# EAGLE board Papilio-VGA_Wing-Panel-v10 (EAGLE 6.3)
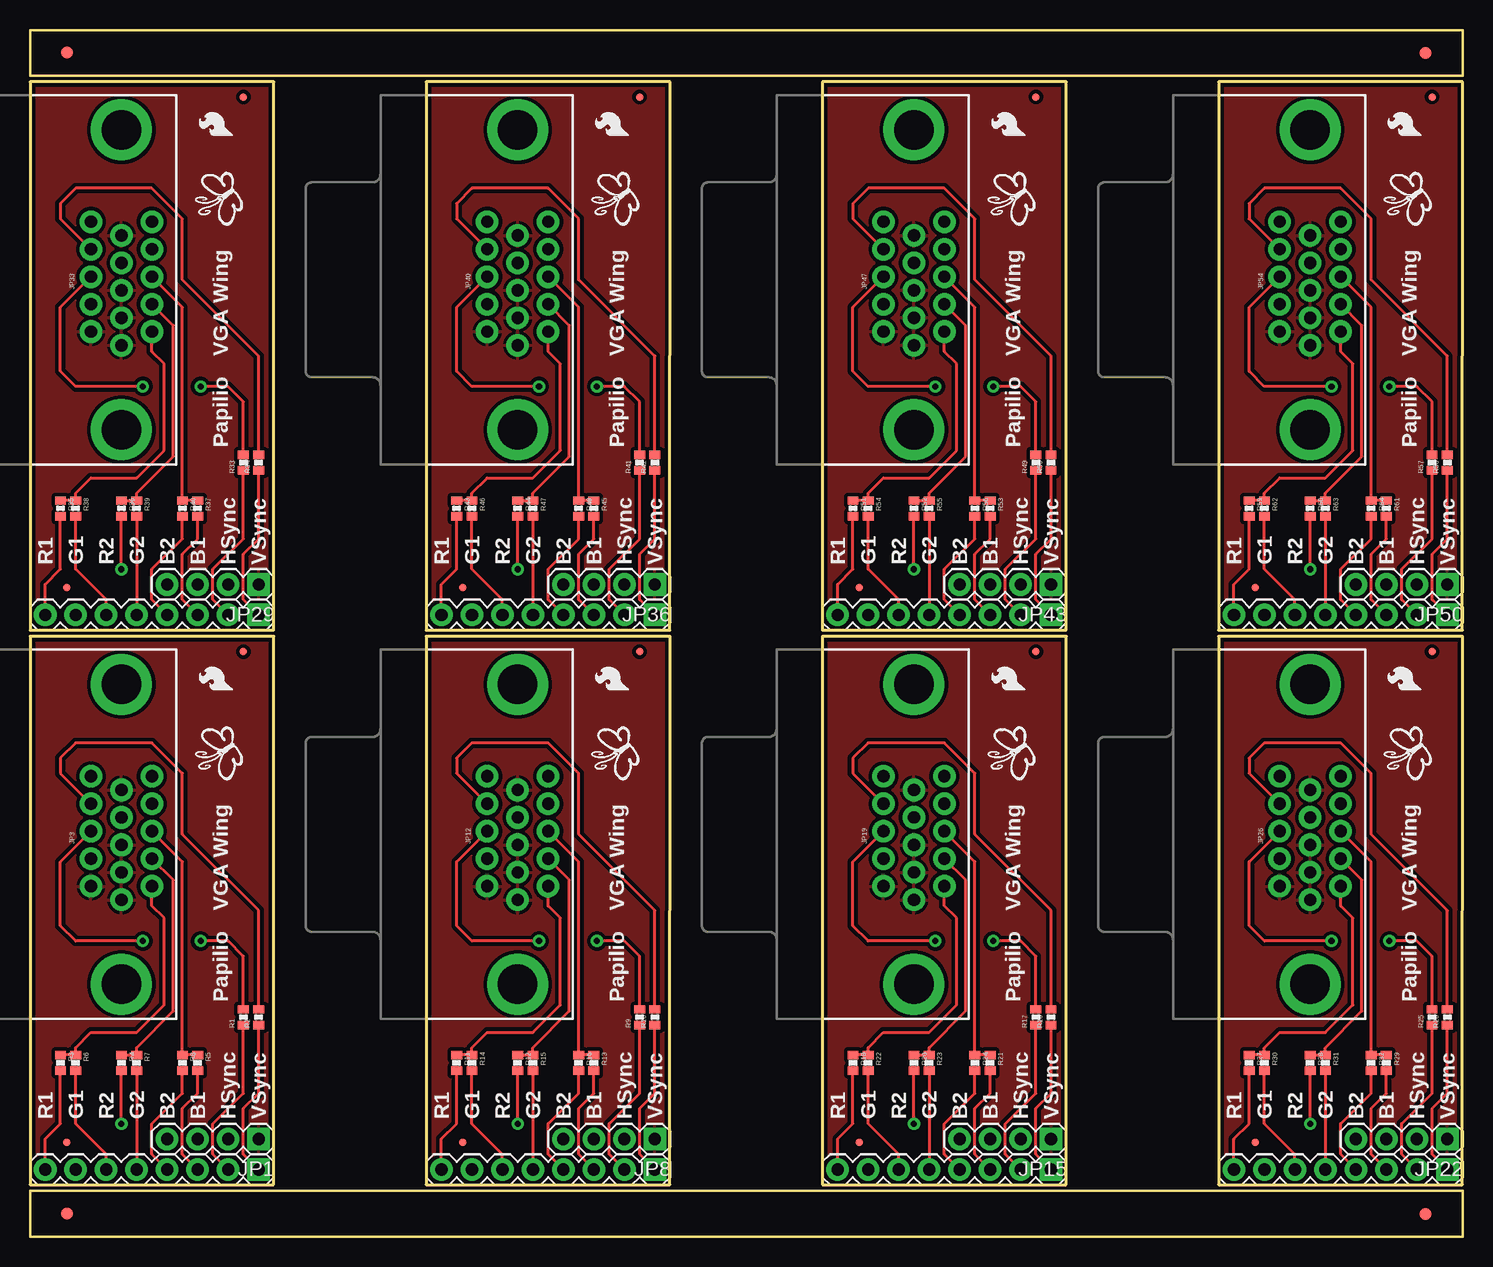
[diagram p0: board, top side]
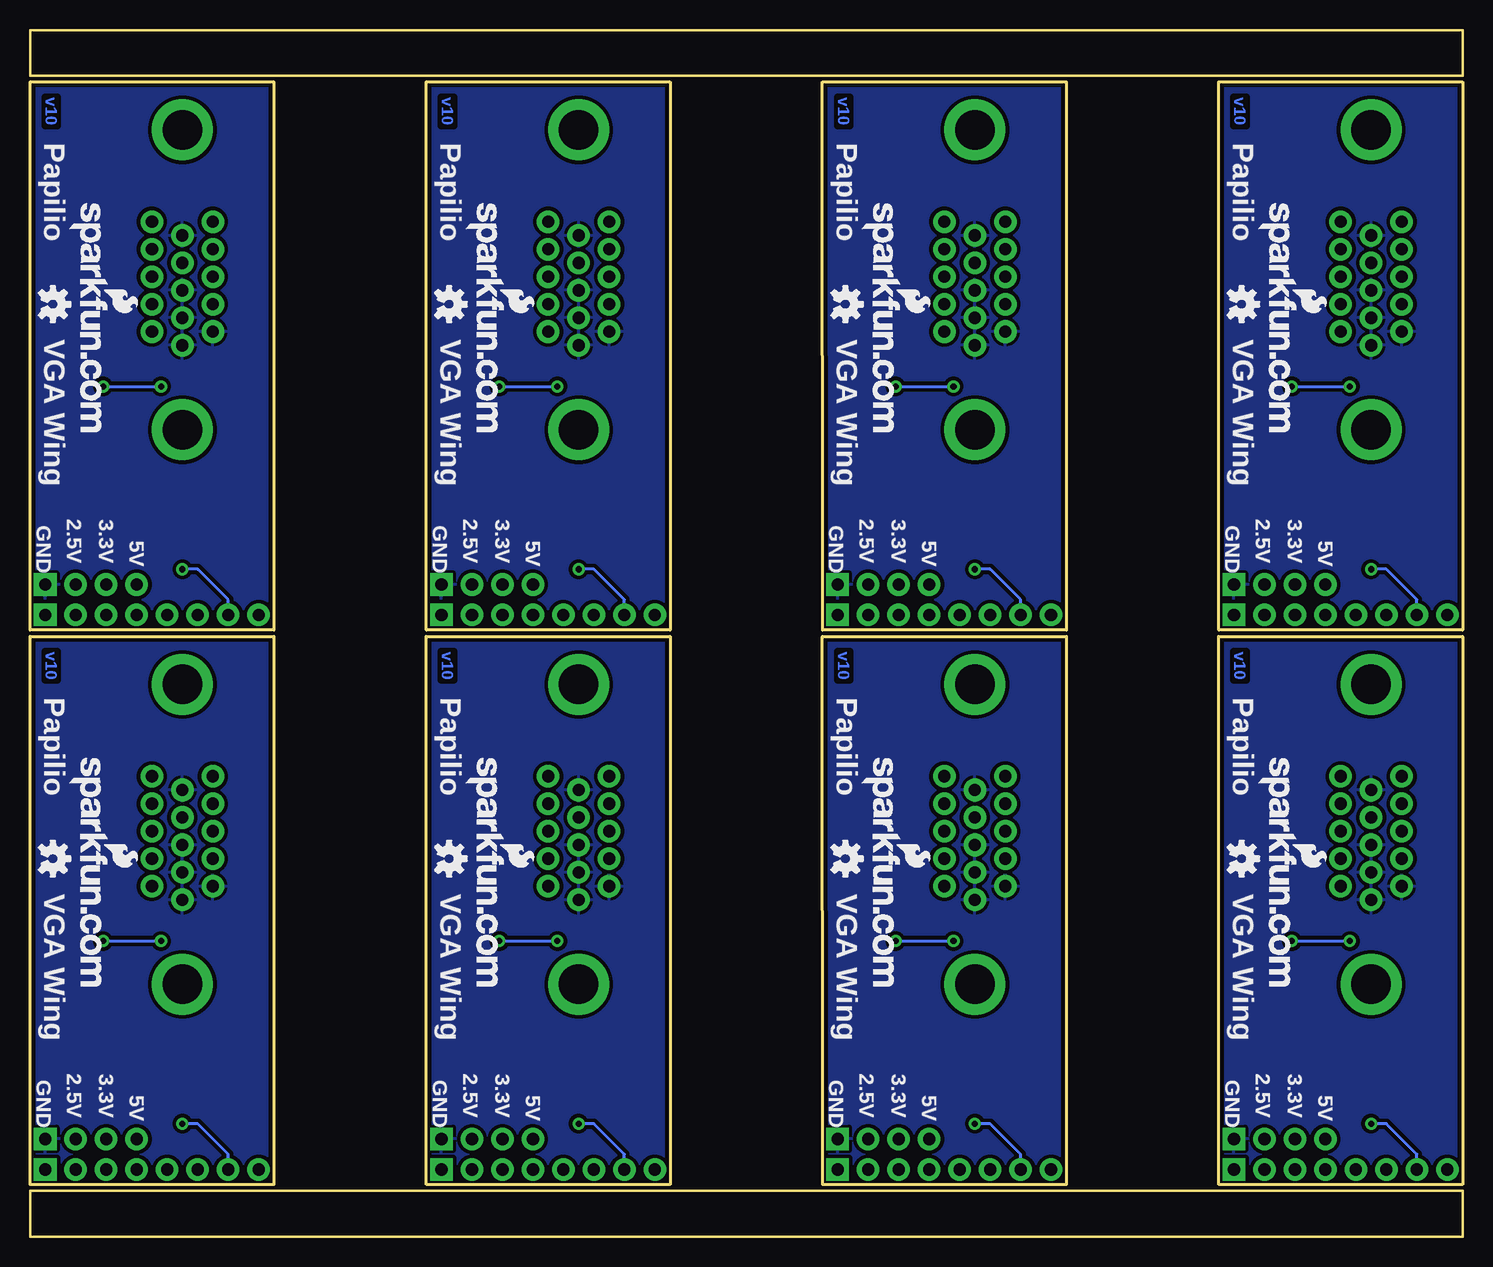
[diagram p1: board, bottom side, seen from below]

Size 119.38 x 100.58 mm. Coordinates in mm from the lower left corner, seen from the top.
Outline: 0,4.32 20.3,4.32 20.32,50.04 0,50.04 0,4.32
Outline: 33.02,4.32 53.32,4.32 53.34,50.04 33.02,50.04 33.02,4.32
Outline: 66.04,4.32 86.34,4.32 86.36,50.04 66.04,50.04 66.04,4.32
Outline: 99.06,4.32 119.36,4.32 119.38,50.04 99.06,50.04 99.06,4.32
Outline: 0,50.55 20.3,50.55 20.32,96.27 0,96.27 0,50.55
Outline: 33.02,50.55 53.32,50.55 53.34,96.27 33.02,96.27 33.02,50.55
Outline: 66.04,50.55 86.34,50.55 86.36,96.27 66.04,96.27 66.04,50.55
Outline: 99.06,50.55 119.36,50.55 119.38,96.27 99.06,96.27 99.06,50.55
Outline: 119.38,3.81 0,3.81 0,0 119.38,0 119.38,3.81
Outline: 119.38,100.58 0,100.58 0,96.77 87.38,96.77 88.9,96.77 119.38,96.77 119.38,100.58
Copper layers (1*16): Top 0.035mm / dielectric 1.5mm / Bottom 0.035mm
Design rules "default": minimum track width 8mil, minimum drill 20mil, track to track 8mil, track to pad 8mil, pad to pad 8mil, via to via 8mil, smd to smd 8mil, copper to edge 8mil, drill to drill 8mil, minimum pad ring 12mil, minimum via ring 10mil, stop-mask expansion 4mil, vias tented up to drill 20mil, thermal gap 10mil

## Footprints (pad centres in the part's own frame; a part is rotated, then mirrored left to right if it is on the bottom)
FIDUCIAL-1X2 = smd 1 x 1: 1 0,0
1X04 = drill 1.016 pad 1.88 square: 1 0,0 | drill 1.016 pad 1.88: 2 2.54,0; 3 5.08,0; 4 7.62,0
1X08 = drill 1.016 pad 1.88 square: 1 0,0 | drill 1.016 pad 1.88: 2 2.54,0; 3 5.08,0; 4 7.62,0; 5 10.16,0; 6 12.7,0; 7 15.24,0; 8 17.78,0
DB15 = drill 1.016 pad 1.88: 1 -4.32,-7.62; 2 -2.03,-7.62; 3 0.26,-7.62; 4 2.55,-7.62; 5 4.84,-7.62; 6 -5.46,-5.08; 7 -3.17,-5.08; 8 -0.88,-5.08; 9 1.41,-5.08; 10 3.7,-5.08; 11 -4.32,-2.54; 12 -2.03,-2.54; 13 0.26,-2.54; 14 2.55,-2.54; 15 4.84,-2.54 | drill 3.302 pad 5.08: G1 -12.5,-5.08; G2 12.5,-5.08
MICRO-FIDUCIAL = smd 0.635 x 0.635: 1 0,0
0402-RES = smd 0.7 x 0.9: 1 -0.65,0; 2 0.65,0

## Placement (x,y rotation side)
E$1  [FIDUCIAL-1X2]  3.07,1.93 90 top
E$2  [FIDUCIAL-1X2]  116.31,1.88 270 top
E$3  [FIDUCIAL-1X2]  116.31,98.65 270 top
E$4  [FIDUCIAL-1X2]  3.07,98.7 90 top
JP1  [1X04]  19.05,8.13 180 top
JP2  [1X08]  19.05,5.59 180 top
JP3  DB15  [DB15]  2.54,33.53 90 top
JP4  FIDUCIALUFIDUCIAL  [MICRO-FIDUCIAL]  3.05,7.87 0 top
JP5  FIDUCIALUFIDUCIAL  [MICRO-FIDUCIAL]  17.78,48.77 0 top
JP6  LOGO-SFENEW  [SFE-NEW-WEBLOGO]  17.02,39.88 270 bottom
JP7  LOGO-SFESK  [SFE-LOGO-FLAME]  16.89,45.59 90 top
JP8  [1X04]  52.07,8.13 180 top
JP9  [1X08]  52.07,5.59 180 top
JP10  LOGO-SFESK  [SFE-LOGO-FLAME]  49.91,45.59 90 top
JP11  LOGO-SFENEW  [SFE-NEW-WEBLOGO]  50.04,39.88 270 bottom
JP12  DB15  [DB15]  35.56,33.53 90 top
JP13  FIDUCIALUFIDUCIAL  [MICRO-FIDUCIAL]  36.07,7.87 0 top
JP14  FIDUCIALUFIDUCIAL  [MICRO-FIDUCIAL]  50.8,48.77 0 top
JP15  [1X04]  85.09,8.13 180 top
JP16  [1X08]  85.09,5.59 180 top
JP17  LOGO-SFESK  [SFE-LOGO-FLAME]  82.93,45.59 90 top
JP18  LOGO-SFENEW  [SFE-NEW-WEBLOGO]  83.06,39.88 270 bottom
JP19  DB15  [DB15]  68.58,33.53 90 top
JP20  FIDUCIALUFIDUCIAL  [MICRO-FIDUCIAL]  69.09,7.87 0 top
JP21  FIDUCIALUFIDUCIAL  [MICRO-FIDUCIAL]  83.82,48.77 0 top
JP22  [1X04]  118.11,8.13 180 top
JP23  [1X08]  118.11,5.59 180 top
JP24  LOGO-SFESK  [SFE-LOGO-FLAME]  115.95,45.59 90 top
JP25  LOGO-SFENEW  [SFE-NEW-WEBLOGO]  116.08,39.88 270 bottom
JP26  DB15  [DB15]  101.6,33.53 90 top
JP27  FIDUCIALUFIDUCIAL  [MICRO-FIDUCIAL]  102.11,7.87 0 top
JP28  FIDUCIALUFIDUCIAL  [MICRO-FIDUCIAL]  116.84,48.77 0 top
JP29  [1X04]  19.05,54.36 180 top
JP30  [1X08]  19.05,51.82 180 top
JP31  LOGO-SFESK  [SFE-LOGO-FLAME]  16.89,91.82 90 top
JP32  LOGO-SFENEW  [SFE-NEW-WEBLOGO]  17.02,86.11 270 bottom
JP33  DB15  [DB15]  2.54,79.76 90 top
JP34  FIDUCIALUFIDUCIAL  [MICRO-FIDUCIAL]  3.05,54.1 0 top
JP35  FIDUCIALUFIDUCIAL  [MICRO-FIDUCIAL]  17.78,95 0 top
JP36  [1X04]  52.07,54.36 180 top
JP37  [1X08]  52.07,51.82 180 top
JP38  LOGO-SFESK  [SFE-LOGO-FLAME]  49.91,91.82 90 top
JP39  LOGO-SFENEW  [SFE-NEW-WEBLOGO]  50.04,86.11 270 bottom
JP40  DB15  [DB15]  35.56,79.76 90 top
JP41  FIDUCIALUFIDUCIAL  [MICRO-FIDUCIAL]  36.07,54.1 0 top
JP42  FIDUCIALUFIDUCIAL  [MICRO-FIDUCIAL]  50.8,95 0 top
JP43  [1X04]  85.09,54.36 180 top
JP44  [1X08]  85.09,51.82 180 top
JP45  LOGO-SFESK  [SFE-LOGO-FLAME]  82.93,91.82 90 top
JP46  LOGO-SFENEW  [SFE-NEW-WEBLOGO]  83.06,86.11 270 bottom
JP47  DB15  [DB15]  68.58,79.76 90 top
JP48  FIDUCIALUFIDUCIAL  [MICRO-FIDUCIAL]  69.09,54.1 0 top
JP49  FIDUCIALUFIDUCIAL  [MICRO-FIDUCIAL]  83.82,95 0 top
JP50  [1X04]  118.11,54.36 180 top
JP51  [1X08]  118.11,51.82 180 top
JP52  LOGO-SFESK  [SFE-LOGO-FLAME]  115.95,91.82 90 top
JP53  LOGO-SFENEW  [SFE-NEW-WEBLOGO]  116.08,86.11 270 bottom
JP54  DB15  [DB15]  101.6,79.76 90 top
JP55  FIDUCIALUFIDUCIAL  [MICRO-FIDUCIAL]  102.11,54.1 0 top
JP56  FIDUCIALUFIDUCIAL  [MICRO-FIDUCIAL]  116.84,95 0 top
R1  82.5  [0402-RES]  17.78,18.29 90 top
R2  82.5  [0402-RES]  19.05,18.29 90 top
R3  270  [0402-RES]  2.54,14.48 270 top
R4  270  [0402-RES]  7.62,14.48 270 top
R5  270  [0402-RES]  13.97,14.48 270 top
R6  270  [0402-RES]  3.81,14.48 270 top
R7  270  [0402-RES]  8.89,14.48 270 top
R8  270  [0402-RES]  12.7,14.48 270 top
R9  82.5  [0402-RES]  50.8,18.29 90 top
R10  82.5  [0402-RES]  52.07,18.29 90 top
R11  270  [0402-RES]  35.56,14.48 270 top
R12  270  [0402-RES]  40.64,14.48 270 top
R13  270  [0402-RES]  46.99,14.48 270 top
R14  270  [0402-RES]  36.83,14.48 270 top
R15  270  [0402-RES]  41.91,14.48 270 top
R16  270  [0402-RES]  45.72,14.48 270 top
R17  82.5  [0402-RES]  83.82,18.29 90 top
R18  82.5  [0402-RES]  85.09,18.29 90 top
R19  270  [0402-RES]  68.58,14.48 270 top
R20  270  [0402-RES]  73.66,14.48 270 top
R21  270  [0402-RES]  80.01,14.48 270 top
R22  270  [0402-RES]  69.85,14.48 270 top
R23  270  [0402-RES]  74.93,14.48 270 top
R24  270  [0402-RES]  78.74,14.48 270 top
R25  82.5  [0402-RES]  116.84,18.29 90 top
R26  82.5  [0402-RES]  118.11,18.29 90 top
R27  270  [0402-RES]  101.6,14.48 270 top
R28  270  [0402-RES]  106.68,14.48 270 top
R29  270  [0402-RES]  113.03,14.48 270 top
R30  270  [0402-RES]  102.87,14.48 270 top
R31  270  [0402-RES]  107.95,14.48 270 top
R32  270  [0402-RES]  111.76,14.48 270 top
R33  82.5  [0402-RES]  17.78,64.52 90 top
R34  82.5  [0402-RES]  19.05,64.52 90 top
R35  270  [0402-RES]  2.54,60.71 270 top
R36  270  [0402-RES]  7.62,60.71 270 top
R37  270  [0402-RES]  13.97,60.71 270 top
R38  270  [0402-RES]  3.81,60.71 270 top
R39  270  [0402-RES]  8.89,60.71 270 top
R40  270  [0402-RES]  12.7,60.71 270 top
R41  82.5  [0402-RES]  50.8,64.52 90 top
R42  82.5  [0402-RES]  52.07,64.52 90 top
R43  270  [0402-RES]  35.56,60.71 270 top
R44  270  [0402-RES]  40.64,60.71 270 top
R45  270  [0402-RES]  46.99,60.71 270 top
R46  270  [0402-RES]  36.83,60.71 270 top
R47  270  [0402-RES]  41.91,60.71 270 top
R48  270  [0402-RES]  45.72,60.71 270 top
R49  82.5  [0402-RES]  83.82,64.52 90 top
R50  82.5  [0402-RES]  85.09,64.52 90 top
R51  270  [0402-RES]  68.58,60.71 270 top
R52  270  [0402-RES]  73.66,60.71 270 top
R53  270  [0402-RES]  80.01,60.71 270 top
R54  270  [0402-RES]  69.85,60.71 270 top
R55  270  [0402-RES]  74.93,60.71 270 top
R56  270  [0402-RES]  78.74,60.71 270 top
R57  82.5  [0402-RES]  116.84,64.52 90 top
R58  82.5  [0402-RES]  118.11,64.52 90 top
R59  270  [0402-RES]  101.6,60.71 270 top
R60  270  [0402-RES]  106.68,60.71 270 top
R61  270  [0402-RES]  113.03,60.71 270 top
R62  270  [0402-RES]  102.87,60.71 270 top
R63  270  [0402-RES]  107.95,60.71 270 top
R64  270  [0402-RES]  111.76,60.71 270 top
U$1  OSHW-LOGOS  [OSHW-LOGO-S]  18.41,31.5 270 bottom
U$2  OSHW-LOGOS  [OSHW-LOGO-S]  51.44,31.5 270 bottom
U$3  OSHW-LOGOS  [OSHW-LOGO-S]  84.45,31.5 270 bottom
U$4  OSHW-LOGOS  [OSHW-LOGO-S]  117.47,31.5 270 bottom
U$5  OSHW-LOGOS  [OSHW-LOGO-S]  18.41,77.72 270 bottom
U$6  OSHW-LOGOS  [OSHW-LOGO-S]  51.44,77.72 270 bottom
U$7  OSHW-LOGOS  [OSHW-LOGO-S]  84.45,77.72 270 bottom
U$8  OSHW-LOGOS  [OSHW-LOGO-S]  117.47,77.72 270 bottom

## Library data of the parts
E$1-E$4 JP4 JP5 JP13 JP14 JP20 JP21 JP27 JP28 JP34 JP35 JP41 JP42 JP48 JP49 JP55 JP56 = SparkFun
JP1-JP3 JP8 JP9 JP12 JP15 JP16 JP19 JP22 JP23 JP26 JP29 JP30 JP33 JP36 JP37 JP40 JP43 JP44 JP47 JP50 JP51 JP54 = SparkFun-Connectors
JP6 JP7 JP10 JP11 JP17 JP18 JP24 JP25 JP31 JP32 JP38 JP39 JP45 JP46 JP52 JP53 U$1-U$8 = SparkFun-Aesthetics
R1-R64 = SparkFun-Passives

## Nets
3.3V: JP1.3
3.3V1: JP8.3
3.3V2: JP15.3
3.3V3: JP22.3
3.3V4: JP29.3
3.3V5: JP36.3
3.3V6: JP43.3
3.3V7: JP50.3
BLUE: JP3.3 R5.1 R8.1
BLUE1: JP2.3 R5.2
BLUE2: JP2.4 R8.2
BLUE3: JP9.3 R13.2
BLUE4: JP9.4 R16.2
BLUE5: JP12.3 R13.1 R16.1
BLUE6: JP16.3 R21.2
BLUE7: JP16.4 R24.2
BLUE8: JP19.3 R21.1 R24.1
BLUE9: JP23.3 R29.2
BLUE10: JP23.4 R32.2
BLUE11: JP26.3 R29.1 R32.1
BLUE12: JP30.3 R37.2
BLUE13: JP30.4 R40.2
BLUE14: JP33.3 R37.1 R40.1
BLUE15: JP37.3 R45.2
BLUE16: JP37.4 R48.2
BLUE17: JP40.3 R45.1 R48.1
BLUE18: JP44.3 R53.2
BLUE19: JP44.4 R56.2
BLUE20: JP47.3 R53.1 R56.1
BLUE21: JP51.3 R61.2
BLUE22: JP51.4 R64.2
BLUE23: JP54.3 R61.1 R64.1
GND: JP1.1 JP3.6 JP3.7 JP3.8 JP3.10 JP3.11
GND1: JP8.1 JP12.6 JP12.7 JP12.8 JP12.10 JP12.11
GND2: JP15.1 JP19.6 JP19.7 JP19.8 JP19.10 JP19.11
GND3: JP22.1 JP26.6 JP26.7 JP26.8 JP26.10 JP26.11
GND4: JP29.1 JP33.6 JP33.7 JP33.8 JP33.10 JP33.11
GND5: JP36.1 JP40.6 JP40.7 JP40.8 JP40.10 JP40.11
GND6: JP43.1 JP47.6 JP47.7 JP47.8 JP47.10 JP47.11
GND7: JP50.1 JP54.6 JP54.7 JP54.8 JP54.10 JP54.11
GREEN: JP3.2 R4.1 R7.1
GREEN1: JP2.7 R4.2
GREEN2: JP2.5 R7.2
GREEN3: JP9.7 R12.2
GREEN4: JP9.5 R15.2
GREEN5: JP12.2 R12.1 R15.1
GREEN6: JP16.7 R20.2
GREEN7: JP16.5 R23.2
GREEN8: JP19.2 R20.1 R23.1
GREEN9: JP23.7 R28.2
GREEN10: JP23.5 R31.2
GREEN11: JP26.2 R28.1 R31.1
GREEN12: JP30.7 R36.2
GREEN13: JP30.5 R39.2
GREEN14: JP33.2 R36.1 R39.1
GREEN15: JP37.7 R44.2
GREEN16: JP37.5 R47.2
GREEN17: JP40.2 R44.1 R47.1
GREEN18: JP44.7 R52.2
GREEN19: JP44.5 R55.2
GREEN20: JP47.2 R52.1 R55.1
GREEN21: JP51.7 R60.2
GREEN22: JP51.5 R63.2
GREEN23: JP54.2 R60.1 R63.1
HSYNC: JP2.2 R1.1
HSYNC1: JP9.2 R9.1
HSYNC2: JP16.2 R17.1
HSYNC3: JP23.2 R25.1
HSYNC4: JP30.2 R33.1
HSYNC5: JP37.2 R41.1
HSYNC6: JP44.2 R49.1
HSYNC7: JP51.2 R57.1
N$1: JP12.13 R9.2
N$2: JP3.13 R1.2
N$3: JP3.14 R2.2
N$4: JP12.14 R10.2
N$5: JP19.13 R17.2
N$6: JP19.14 R18.2
N$7: JP26.13 R25.2
N$8: JP26.14 R26.2
N$9: JP33.13 R33.2
N$10: JP33.14 R34.2
N$11: JP40.13 R41.2
N$12: JP40.14 R42.2
N$13: JP47.13 R49.2
N$14: JP47.14 R50.2
N$15: JP54.13 R57.2
N$16: JP54.14 R58.2
RED: JP3.1 R3.1 R6.1
RED1: JP2.8 R3.2
RED2: JP2.6 R6.2
RED3: JP9.8 R11.2
RED4: JP9.6 R14.2
RED5: JP12.1 R11.1 R14.1
RED6: JP16.8 R19.2
RED7: JP16.6 R22.2
RED8: JP19.1 R19.1 R22.1
RED9: JP23.8 R27.2
RED10: JP23.6 R30.2
RED11: JP26.1 R27.1 R30.1
RED12: JP30.8 R35.2
RED13: JP30.6 R38.2
RED14: JP33.1 R35.1 R38.1
RED15: JP37.8 R43.2
RED16: JP37.6 R46.2
RED17: JP40.1 R43.1 R46.1
RED18: JP44.8 R51.2
RED19: JP44.6 R54.2
RED20: JP47.1 R51.1 R54.1
RED21: JP51.8 R59.2
RED22: JP51.6 R62.2
RED23: JP54.1 R59.1 R62.1
VSYNC: JP2.1 R2.1
VSYNC1: JP9.1 R10.1
VSYNC2: JP16.1 R18.1
VSYNC3: JP23.1 R26.1
VSYNC4: JP30.1 R34.1
VSYNC5: JP37.1 R42.1
VSYNC6: JP44.1 R50.1
VSYNC7: JP51.1 R58.1

## Tracks (layer width: path | path; a pad name or v marks a point on that pad's centre or on a via)
BLUE
  Top 0.254: R5.1 R8.1 12.7,31.25 JP3.3
BLUE1
  Top 0.254: JP2.3 12.7,6.86 12.7,10.67 13.97,11.94 R5.2
BLUE2
  Top 0.254: JP2.4 10.16,6.86 10.16,9.4 12.7,11.94 R8.2
BLUE3
  Top 0.254: JP9.3 45.72,6.86 45.72,10.67 46.99,11.94 R13.2
BLUE4
  Top 0.254: JP9.4 43.18,6.86 43.18,9.4 45.72,11.94 R16.2
BLUE5
  Top 0.254: R13.1 R16.1 45.72,31.25 JP12.3
BLUE6
  Top 0.254: JP16.3 78.74,6.86 78.74,10.67 80.01,11.94 R21.2
BLUE7
  Top 0.254: JP16.4 76.2,6.86 76.2,9.4 78.74,11.94 R24.2
BLUE8
  Top 0.254: R21.1 R24.1 78.74,31.25 JP19.3
BLUE9
  Top 0.254: JP23.3 111.76,6.86 111.76,10.67 113.03,11.94 R29.2
BLUE10
  Top 0.254: JP23.4 109.22,6.86 109.22,9.4 111.76,11.94 R32.2
BLUE11
  Top 0.254: R29.1 R32.1 111.76,31.25 JP26.3
BLUE12
  Top 0.254: JP30.3 12.7,53.09 12.7,56.9 13.97,58.17 R37.2
BLUE13
  Top 0.254: JP30.4 10.16,53.09 10.16,55.63 12.7,58.17 R40.2
BLUE14
  Top 0.254: R37.1 R40.1 12.7,77.48 JP33.3
BLUE15
  Top 0.254: JP37.3 45.72,53.09 45.72,56.9 46.99,58.17 R45.2
BLUE16
  Top 0.254: JP37.4 43.18,53.09 43.18,55.63 45.72,58.17 R48.2
BLUE17
  Top 0.254: R45.1 R48.1 45.72,77.48 JP40.3
BLUE18
  Top 0.254: JP44.3 78.74,53.09 78.74,56.9 80.01,58.17 R53.2
BLUE19
  Top 0.254: JP44.4 76.2,53.09 76.2,55.63 78.74,58.17 R56.2
BLUE20
  Top 0.254: R53.1 R56.1 78.74,77.48 JP47.3
BLUE21
  Top 0.254: JP51.3 111.76,53.09 111.76,56.9 113.03,58.17 R61.2
BLUE22
  Top 0.254: JP51.4 109.22,53.09 109.22,55.63 111.76,58.17 R64.2
BLUE23
  Top 0.254: R61.1 R64.1 111.76,77.48 JP54.3
GND
  pour Top (isolate 0.305): 0,4.32 0,50.04 20.32,50.04 20.32,4.32
  pour Bottom (isolate 0.305): 0,4.32 0,50.04 20.32,50.04 20.32,4.32
GND1
  pour Top (isolate 0.305): 33.02,4.32 33.02,50.04 53.34,50.04 53.34,4.32
  pour Bottom (isolate 0.305): 33.02,4.32 33.02,50.04 53.34,50.04 53.34,4.32
GND2
  pour Top (isolate 0.305): 66.04,4.32 66.04,50.04 86.36,50.04 86.36,4.32
  pour Bottom (isolate 0.305): 66.04,4.32 66.04,50.04 86.36,50.04 86.36,4.32
GND3
  pour Top (isolate 0.305): 99.06,4.32 99.06,50.04 119.38,50.04 119.38,4.32
  pour Bottom (isolate 0.305): 99.06,4.32 99.06,50.04 119.38,50.04 119.38,4.32
GND4
  pour Top (isolate 0.305): 0,50.55 0,96.27 20.32,96.27 20.32,50.55
  pour Bottom (isolate 0.305): 0,50.55 0,96.27 20.32,96.27 20.32,50.55
GND5
  pour Top (isolate 0.305): 33.02,50.55 33.02,96.27 53.34,96.27 53.34,50.55
  pour Bottom (isolate 0.305): 33.02,50.55 33.02,96.27 53.34,96.27 53.34,50.55
GND6
  pour Top (isolate 0.305): 66.04,50.55 66.04,96.27 86.36,96.27 86.36,50.55
  pour Bottom (isolate 0.305): 66.04,50.55 66.04,96.27 86.36,96.27 86.36,50.55
GND7
  pour Top (isolate 0.305): 99.06,50.55 99.06,96.27 119.38,96.27 119.38,50.55
  pour Bottom (isolate 0.305): 99.06,50.55 99.06,96.27 119.38,96.27 119.38,50.55
GREEN
  Top 0.254: R4.1 R7.1 8.89,15.75 11.94,18.8 11.94,29.72 JP3.2
GREEN1  (via drill 0.51)
  Top 0.254: v7.62,9.4 R4.2
  Bottom 0.254: JP2.7 3.81,6.86 6.35,9.4 v7.62,9.4
GREEN2
  Top 0.254: R7.2 JP2.5
GREEN3  (via drill 0.51)
  Top 0.254: v40.64,9.4 R12.2
  Bottom 0.254: JP9.7 36.83,6.86 39.37,9.4 v40.64,9.4
GREEN4
  Top 0.254: R15.2 JP9.5
GREEN5
  Top 0.254: R12.1 R15.1 41.91,15.75 44.96,18.8 44.96,29.72 JP12.2
GREEN6  (via drill 0.51)
  Top 0.254: v73.66,9.4 R20.2
  Bottom 0.254: JP16.7 69.85,6.86 72.39,9.4 v73.66,9.4
GREEN7
  Top 0.254: R23.2 JP16.5
GREEN8
  Top 0.254: R20.1 R23.1 74.93,15.75 77.98,18.8 77.98,29.72 JP19.2
GREEN9  (via drill 0.51)
  Top 0.254: v106.68,9.4 R28.2
  Bottom 0.254: JP23.7 102.87,6.86 105.41,9.4 v106.68,9.4
GREEN10
  Top 0.254: R31.2 JP23.5
GREEN11
  Top 0.254: R28.1 R31.1 107.95,15.75 111,18.8 111,29.72 JP26.2
GREEN12  (via drill 0.51)
  Top 0.254: v7.62,55.63 R36.2
  Bottom 0.254: JP30.7 3.81,53.09 6.35,55.63 v7.62,55.63
GREEN13
  Top 0.254: R39.2 JP30.5
GREEN14
  Top 0.254: R36.1 R39.1 8.89,61.98 11.94,65.02 11.94,75.95 JP33.2
GREEN15  (via drill 0.51)
  Top 0.254: v40.64,55.63 R44.2
  Bottom 0.254: JP37.7 36.83,53.09 39.37,55.63 v40.64,55.63
GREEN16
  Top 0.254: R47.2 JP37.5
GREEN17
  Top 0.254: R44.1 R47.1 41.91,61.98 44.96,65.02 44.96,75.95 JP40.2
GREEN18  (via drill 0.51)
  Top 0.254: v73.66,55.63 R52.2
  Bottom 0.254: JP44.7 69.85,53.09 72.39,55.63 v73.66,55.63
GREEN19
  Top 0.254: R55.2 JP44.5
GREEN20
  Top 0.254: R52.1 R55.1 74.93,61.98 77.98,65.02 77.98,75.95 JP47.2
GREEN21  (via drill 0.51)
  Top 0.254: v106.68,55.63 R60.2
  Bottom 0.254: JP51.7 102.87,53.09 105.41,55.63 v106.68,55.63
GREEN22
  Top 0.254: R63.2 JP51.5
GREEN23
  Top 0.254: R60.1 R63.1 107.95,61.98 111,65.02 111,75.95 JP54.2
HSYNC
  Top 0.254: JP2.2 15.24,6.86 15.24,9.4 17.78,11.94 R1.1
HSYNC1
  Top 0.254: JP9.2 48.26,6.86 48.26,9.4 50.8,11.94 R9.1
HSYNC2
  Top 0.254: JP16.2 81.28,6.86 81.28,9.4 83.82,11.94 R17.1
HSYNC3
  Top 0.254: JP23.2 114.3,6.86 114.3,9.4 116.84,11.94 R25.1
HSYNC4
  Top 0.254: JP30.2 15.24,53.09 15.24,55.63 17.78,58.17 R33.1
HSYNC5
  Top 0.254: JP37.2 48.26,53.09 48.26,55.63 50.8,58.17 R41.1
HSYNC6
  Top 0.254: JP44.2 81.28,53.09 81.28,55.63 83.82,58.17 R49.1
HSYNC7
  Top 0.254: JP51.2 114.3,53.09 114.3,55.63 116.84,58.17 R57.1
N$1  (via drill 0.51)
  Top 0.254: R9.2 50.8,23.37 49.53,24.64 v47.24,24.64 | JP12.13 35.56,31.25 35.56,25.91 36.83,24.64 v42.42,24.64
  Bottom 0.254: v47.24,24.64 v42.42,24.64
N$2  (via drill 0.51)
  Top 0.254: R1.2 17.78,23.37 16.51,24.64 v14.22,24.64 | JP3.13 2.54,31.25 2.54,25.91 3.81,24.64 v9.4,24.64
  Bottom 0.254: v14.22,24.64 v9.4,24.64
N$3
  Top 0.254: R2.2 19.05,27.18 12.7,33.53 12.7,38.61 10.16,41.15 3.81,41.15 2.54,39.88 2.54,38.61 JP3.14
N$4
  Top 0.254: R10.2 52.07,27.18 45.72,33.53 45.72,38.61 43.18,41.15 36.83,41.15 35.56,39.88 35.56,38.61 JP12.14
N$5  (via drill 0.51)
  Top 0.254: R17.2 83.82,23.37 82.55,24.64 v80.26,24.64 | JP19.13 68.58,31.25 68.58,25.91 69.85,24.64 v75.44,24.64
  Bottom 0.254: v80.26,24.64 v75.44,24.64
N$6
  Top 0.254: R18.2 85.09,27.18 78.74,33.53 78.74,38.61 76.2,41.15 69.85,41.15 68.58,39.88 68.58,38.61 JP19.14
N$7  (via drill 0.51)
  Top 0.254: R25.2 116.84,23.37 115.57,24.64 v113.28,24.64 | JP26.13 101.6,31.25 101.6,25.91 102.87,24.64 v108.46,24.64
  Bottom 0.254: v113.28,24.64 v108.46,24.64
N$8
  Top 0.254: R26.2 118.11,27.18 111.76,33.53 111.76,38.61 109.22,41.15 102.87,41.15 101.6,39.88 101.6,38.61 JP26.14
N$9  (via drill 0.51)
  Top 0.254: R33.2 17.78,69.6 16.51,70.87 v14.22,70.87 | JP33.13 2.54,77.48 2.54,72.14 3.81,70.87 v9.4,70.87
  Bottom 0.254: v14.22,70.87 v9.4,70.87
N$10
  Top 0.254: R34.2 19.05,73.41 12.7,79.76 12.7,84.84 10.16,87.38 3.81,87.38 2.54,86.11 2.54,84.84 JP33.14
N$11  (via drill 0.51)
  Top 0.254: R41.2 50.8,69.6 49.53,70.87 v47.24,70.87 | JP40.13 35.56,77.48 35.56,72.14 36.83,70.87 v42.42,70.87
  Bottom 0.254: v47.24,70.87 v42.42,70.87
N$12
  Top 0.254: R42.2 52.07,73.41 45.72,79.76 45.72,84.84 43.18,87.38 36.83,87.38 35.56,86.11 35.56,84.84 JP40.14
N$13  (via drill 0.51)
  Top 0.254: R49.2 83.82,69.6 82.55,70.87 v80.26,70.87 | JP47.13 68.58,77.48 68.58,72.14 69.85,70.87 v75.44,70.87
  Bottom 0.254: v80.26,70.87 v75.44,70.87
N$14
  Top 0.254: R50.2 85.09,73.41 78.74,79.76 78.74,84.84 76.2,87.38 69.85,87.38 68.58,86.11 68.58,84.84 JP47.14
N$15  (via drill 0.51)
  Top 0.254: R57.2 116.84,69.6 115.57,70.87 v113.28,70.87 | JP54.13 101.6,77.48 101.6,72.14 102.87,70.87 v108.46,70.87
  Bottom 0.254: v113.28,70.87 v108.46,70.87
N$16
  Top 0.254: R58.2 118.11,73.41 111.76,79.76 111.76,84.84 109.22,87.38 102.87,87.38 101.6,86.11 101.6,84.84 JP54.14
RED
  Top 0.254: R3.1 R6.1 3.81,15.75 5.08,17.02 8.89,17.02 11.18,19.3 11.18,26.54 10.16,27.56 JP3.1
RED1
  Top 0.254: JP2.8 1.27,8.13 2.54,9.4 R3.2
RED2
  Top 0.254: JP2.6 6.35,6.86 3.81,9.4 R6.2
RED3
  Top 0.254: JP9.8 34.29,8.13 35.56,9.4 R11.2
RED4
  Top 0.254: JP9.6 39.37,6.86 36.83,9.4 R14.2
RED5
  Top 0.254: R11.1 R14.1 36.83,15.75 38.1,17.02 41.91,17.02 44.2,19.3 44.2,26.54 43.18,27.56 JP12.1
RED6
  Top 0.254: JP16.8 67.31,8.13 68.58,9.4 R19.2
RED7
  Top 0.254: JP16.6 72.39,6.86 69.85,9.4 R22.2
RED8
  Top 0.254: R19.1 R22.1 69.85,15.75 71.12,17.02 74.93,17.02 77.22,19.3 77.22,26.54 76.2,27.56 JP19.1
RED9
  Top 0.254: JP23.8 100.33,8.13 101.6,9.4 R27.2
RED10
  Top 0.254: JP23.6 105.41,6.86 102.87,9.4 R30.2
RED11
  Top 0.254: R27.1 R30.1 102.87,15.75 104.14,17.02 107.95,17.02 110.24,19.3 110.24,26.54 109.22,27.56 JP26.1
RED12
  Top 0.254: JP30.8 1.27,54.36 2.54,55.63 R35.2
RED13
  Top 0.254: JP30.6 6.35,53.09 3.81,55.63 R38.2
RED14
  Top 0.254: R35.1 R38.1 3.81,61.98 5.08,63.25 8.89,63.25 11.18,65.53 11.18,72.77 10.16,73.79 JP33.1
RED15
  Top 0.254: JP37.8 34.29,54.36 35.56,55.63 R43.2
RED16
  Top 0.254: JP37.6 39.37,53.09 36.83,55.63 R46.2
RED17
  Top 0.254: R43.1 R46.1 36.83,61.98 38.1,63.25 41.91,63.25 44.2,65.53 44.2,72.77 43.18,73.79 JP40.1
RED18
  Top 0.254: JP44.8 67.31,54.36 68.58,55.63 R51.2
RED19
  Top 0.254: JP44.6 72.39,53.09 69.85,55.63 R54.2
RED20
  Top 0.254: R51.1 R54.1 69.85,61.98 71.12,63.25 74.93,63.25 77.22,65.53 77.22,72.77 76.2,73.79 JP47.1
RED21
  Top 0.254: JP51.8 100.33,54.36 101.6,55.63 R59.2
RED22
  Top 0.254: JP51.6 105.41,53.09 102.87,55.63 R62.2
RED23
  Top 0.254: R59.1 R62.1 102.87,61.98 104.14,63.25 107.95,63.25 110.24,65.53 110.24,72.77 109.22,73.79 JP54.1
VSYNC
  Top 0.254: JP2.1 17.78,6.86 17.78,10.67 19.05,11.94 R2.1
VSYNC1
  Top 0.254: JP9.1 50.8,6.86 50.8,10.67 52.07,11.94 R10.1
VSYNC2
  Top 0.254: JP16.1 83.82,6.86 83.82,10.67 85.09,11.94 R18.1
VSYNC3
  Top 0.254: JP23.1 116.84,6.86 116.84,10.67 118.11,11.94 R26.1
VSYNC4
  Top 0.254: JP30.1 17.78,53.09 17.78,56.9 19.05,58.17 R34.1
VSYNC5
  Top 0.254: JP37.1 50.8,53.09 50.8,56.9 52.07,58.17 R42.1
VSYNC6
  Top 0.254: JP44.1 83.82,53.09 83.82,56.9 85.09,58.17 R50.1
VSYNC7
  Top 0.254: JP51.1 116.84,53.09 116.84,56.9 118.11,58.17 R58.1

## Text on the board
Bottom: v10 | v10 | v10 | v10 | v10 | v10 | v10 | v10
tPlace: VGA Wing | VGA Wing | VGA Wing | VGA Wing | Papilio | Papilio | Papilio | Papilio | R1 | G1 | R2 | G2 | B2 | B1 | HSync | VSync | R1 | G1 | R2 | G2 | B2 | B1 | HSync | VSync | R1 | G1 | R2 | G2 | B2 | B1 | HSync | VSync | R1 | G1 | R2 | G2 | B2 | B1 | HSync | VSync | VGA Wing | VGA Wing | VGA Wing | VGA Wing | Papilio | Papilio | Papilio | Papilio | R1 | G1 | R2 | G2 | B2 | B1 | HSync | VSync | R1 | G1 | R2 | G2 | B2 | B1 | HSync | VSync | R1 | G1 | R2 | G2 | B2 | B1 | HSync | VSync | R1 | G1 | R2 | G2 | B2 | B1 | HSync | VSync
bPlace: Papilio | Papilio | Papilio | Papilio | VGA Wing | VGA Wing | VGA Wing | VGA Wing | 3.3V | 2.5V | GND | 3.3V | 2.5V | GND | 3.3V | 2.5V | GND | 3.3V | 2.5V | GND | 5V | 5V | 5V | 5V | Papilio | Papilio | Papilio | Papilio | VGA Wing | VGA Wing | VGA Wing | VGA Wing | 3.3V | 2.5V | GND | 3.3V | 2.5V | GND | 3.3V | 2.5V | GND | 3.3V | 2.5V | GND | 5V | 5V | 5V | 5V